# Altium PCB Toffee.PcbDoc
Units mil, origin at the board's own origin, x right, y up, seen from the top; angles counter-clockwise.
Board outline 2249.71 x 1000 mil, 4 copper layers (Component Side, Ground Plane, Power Plane, Solder Side), stack 33.234 mil thick; 139 components, 108 nets, 725 pads, 10 vias.
Unrouted connection lines stored in the file: 521.
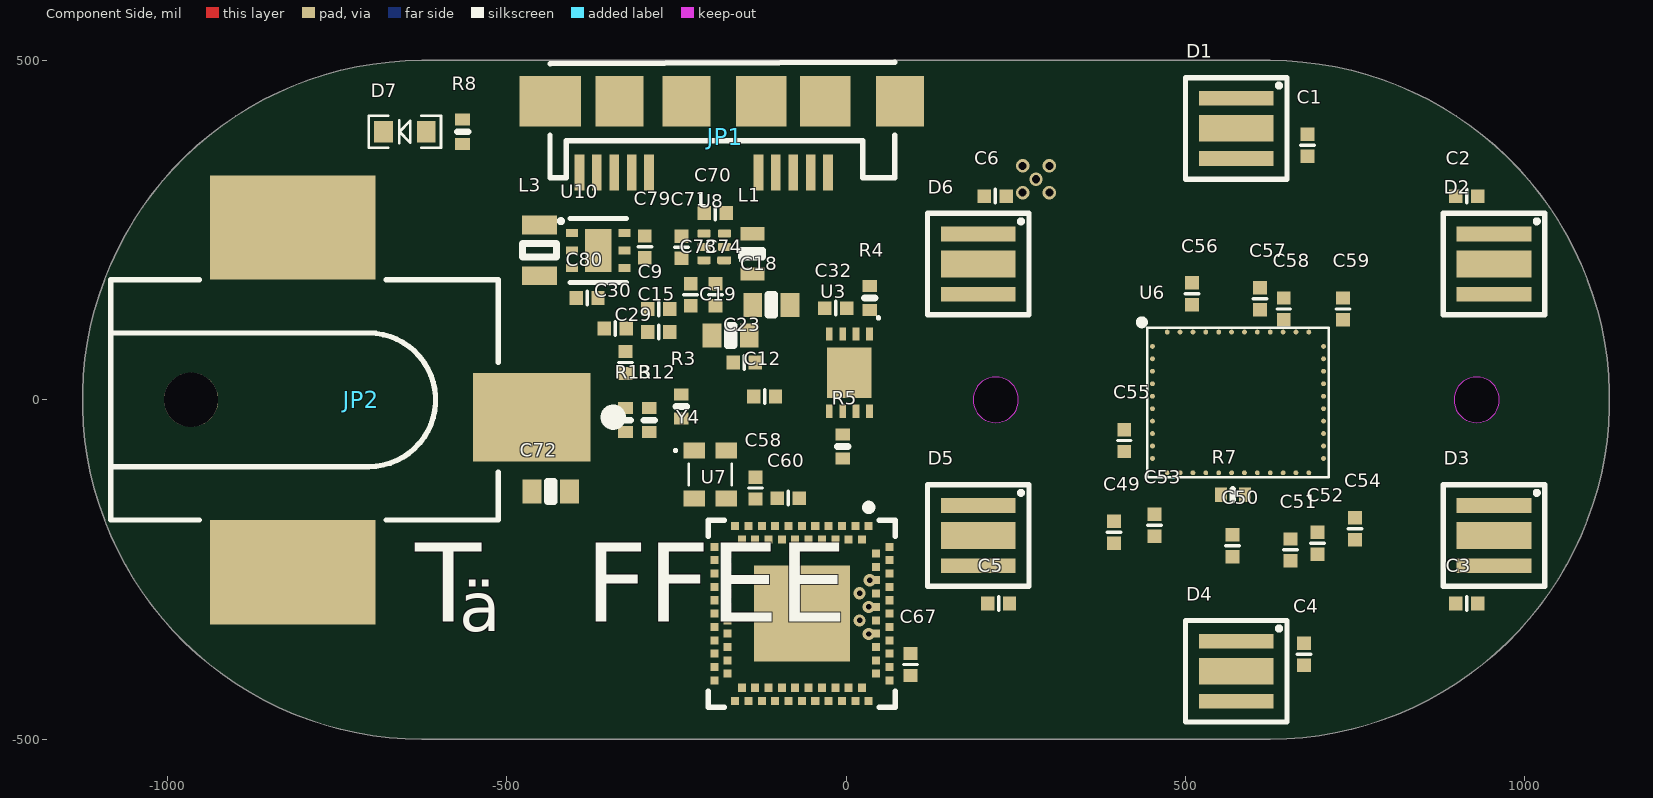
[diagram p0: Component Side view]
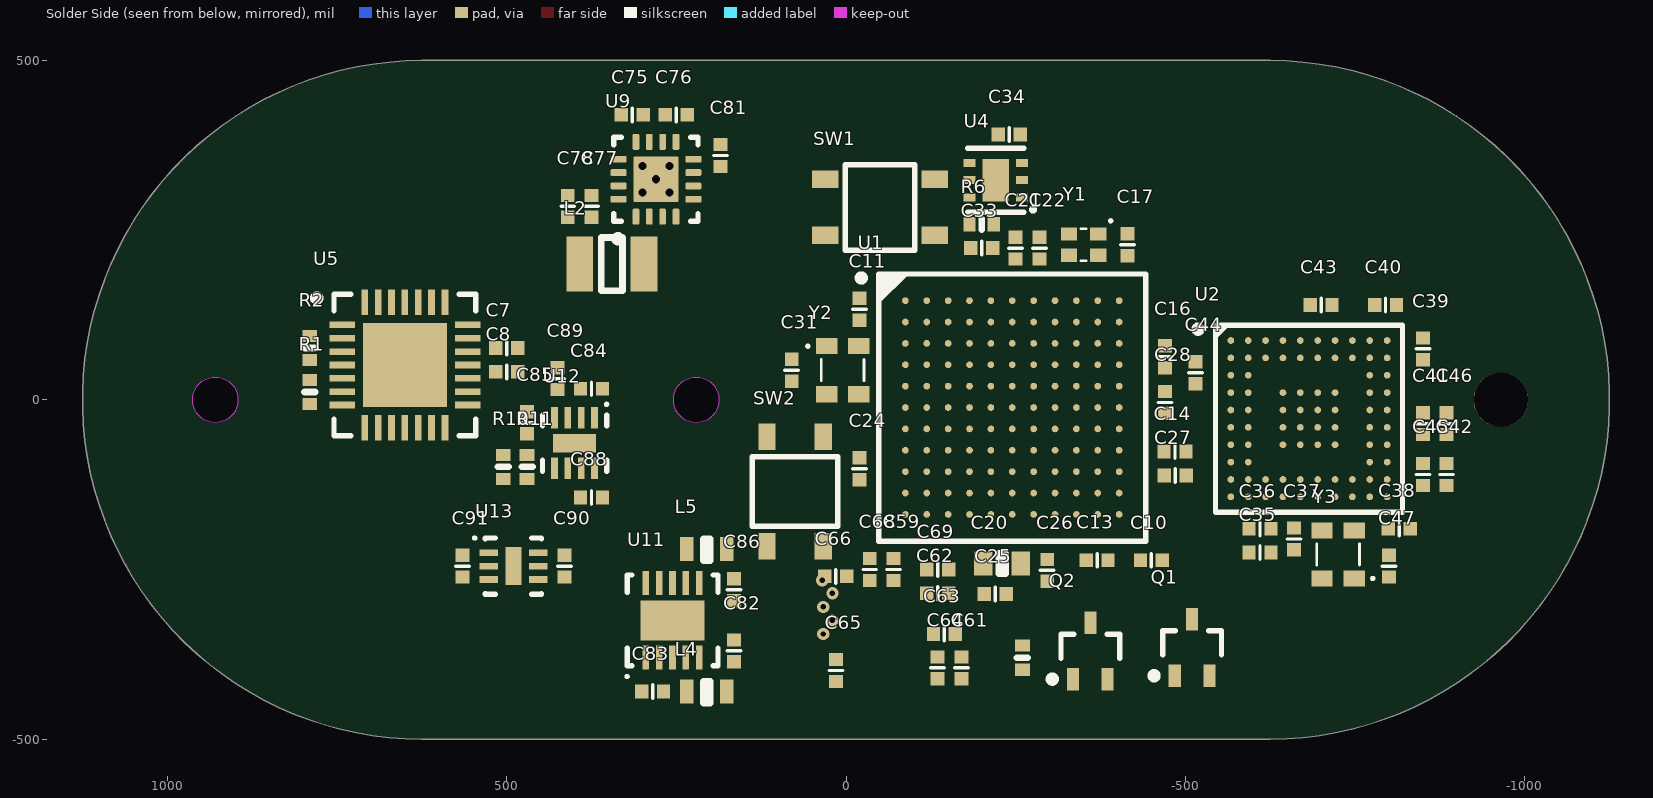
[diagram p1: Solder Side view, seen from below]
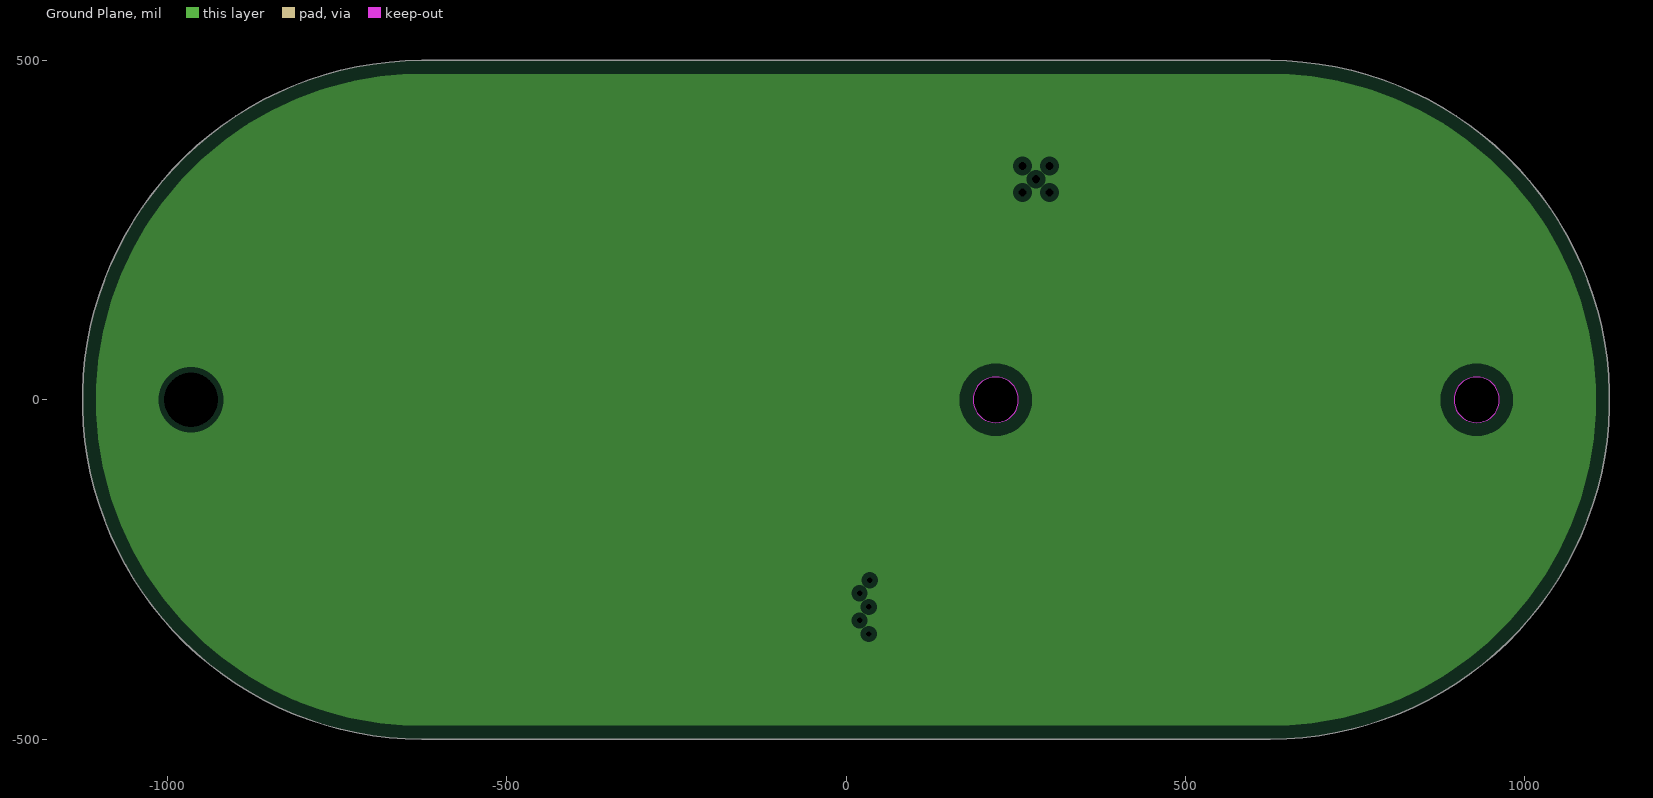
[diagram p2: Ground Plane, clearances drawn from the general rule]
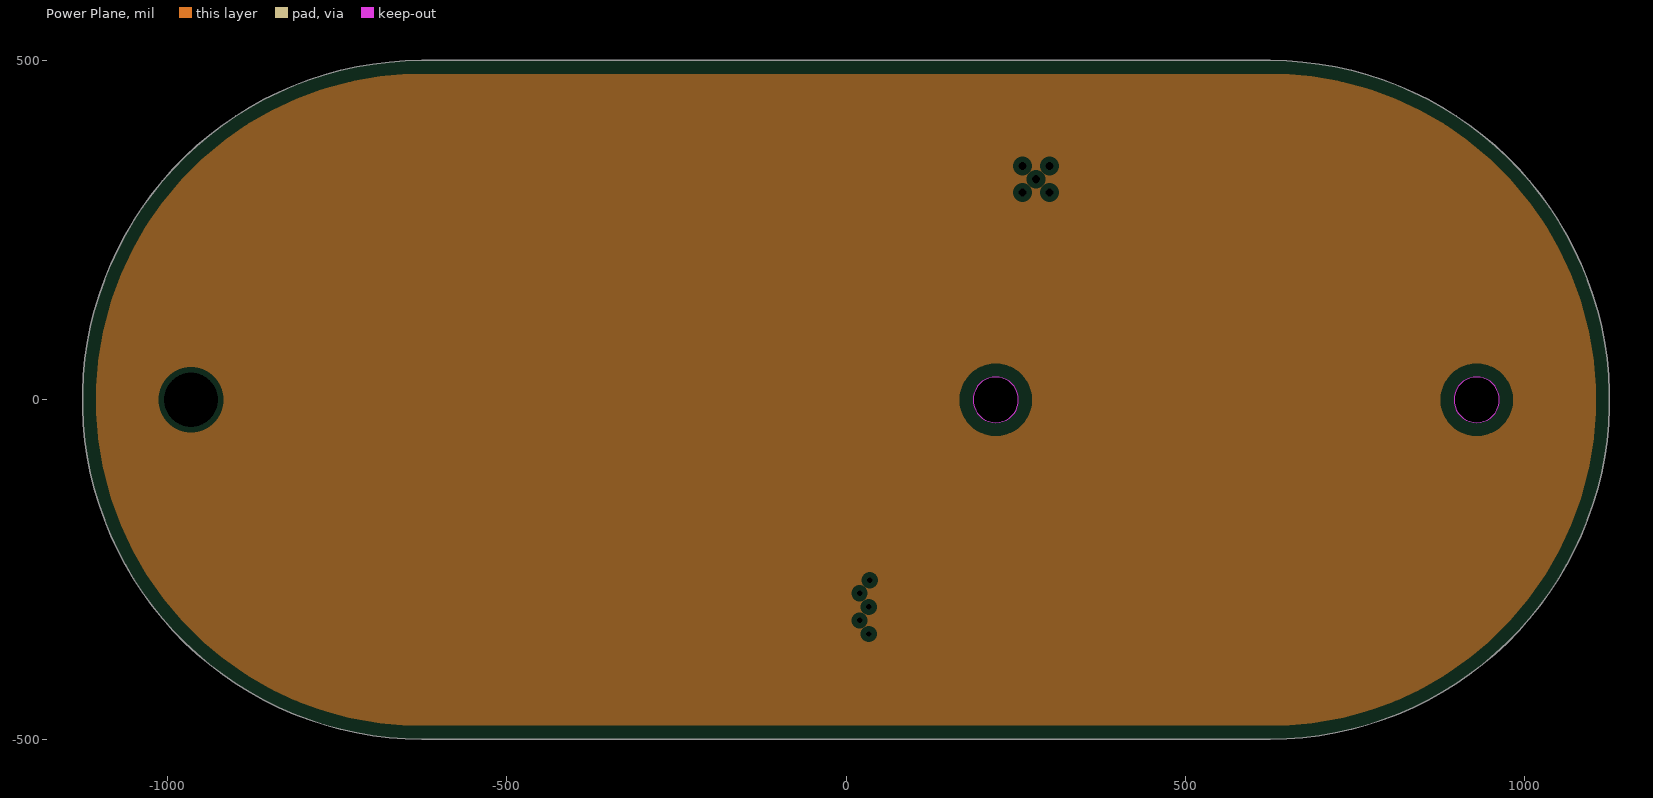
[diagram p3: Power Plane, clearances drawn from the general rule]

## Layer stack, top to bottom
Top Solder: solder mask 0.4, Solder Resist, Dk 3.5
Component Side: signal copper 1.4
Dielectric 1: core 12.6, FR-4, Dk 4.8
Ground Plane: plane copper 1.417
Dielectric 3: prepreg 5, Dk 4.2
Power Plane: plane copper 1.417
Dielectric 4: core 10, Dk 4.2
Solder Side: signal copper 1.4
Bottom Solder: solder mask 0.4, Solder Resist, Dk 3.5

## Board outline
-625,-500 625,-500 ccw(c625,0) 625,500 -625,500 ccw(c-625,0)
cut-out: 187.2,0 ccw(c220.67,0) 220.67,-33.46 ccw(c220.67,0) 254.13,0 ccw(c220.67,0) 220.67,33.46 ccw(c220.67,0)
cut-out: 895.87,0 ccw(c929.33,0) 929.33,-33.46 ccw(c929.33,0) 962.8,0 ccw(c929.33,0) 929.33,33.46 ccw(c929.33,0)

## Design rules (kind name [scope] priority, off if disabled: settings)
Clearance [All] p1: gap=5 ignorepadtopadclearanceinfootprint=FALSE
DiffPairsRouting [All] p1: maxlimit=5 minlimit=5 mostfreqgap=5 toplayer_minwidth=5 toplayer_maxwidth=5 toplayer_prefwidth=5 bottomlayer_minwidth=5 bottomlayer_maxwidth=5 bottomlayer_prefwidth=5 maxuncoupledlength=500
PlaneClearance [All] p1: clearance=8
PlaneConnect [All] p1: planeconnectstyle=Direct reliefexpansion=10 reliefentries=4 reliefconductorwidth=20 reliefairgap=10
PolygonConnect [All] p1: connectstyle=Relief reliefconductorwidth=20 reliefentries=4 polygonreliefangle="90 Angle" airgapwidth=8
RoutingVias [All] p1: holewidth=8 width=18 viastyle="Through Hole" minholewidth=8 minwidth=18 maxholewidth=15 maxwidth=30
SolderMaskExpansion [All] p1: expansion=3 soldermaskfromhole=TRUE
Width [All] p1: maxlimit=20 minlimit=5 preferedwidth=5
27 further rules are at their usual default settings.

## Classes and differential pairs
differential pair class USB2: D MIPI_C MIPI_D0 MIPI_D1 MIPI_D2 MIPI_D3
differential pair class SSTX: SSTX
differential pair class SSRX: SSRX
component class U_Power: C70 C71 C72 C75 C76 C77 C78 C79 C80 C81 C82 C83 C84 C85 C86 C88 C89 C90 C91 D7 JP2 L1 L2 L3 L4 L5 R8 R10 R11 U8 U9 U10 U11 U12 U13
component class U_MLX75123: C58 C59 C60 C61 C62 C63 C64 C65 C66 C67 C68 C69 U7 Y4
component class U_MLX75023: C49 C50 C51 C52 C53 C54 C55 C56 C57 C58 C59 R7 U6
component class U_MIPI-Bridge: C35 C36 C37 C38 C39 C40 C41 C42 C43 C44 C45 C46 C47 U2 Y3
component class U_MCU: C9 C10 C11 C12 C13 C14 C15 C16 C17 C18 C19 C20 C21 C22 C23 C24 C25 C26 C27 C28 C29 C30 C31 C32 C33 C34 C73 C74 JP1 Q1 Q2 R3 R4 R5 R6 R12 R13 SW1 SW2 U1 U3 U4 Y1 Y2
component class U_LEDs: C1 C2 C3 C4 C5 C6 C7 C8 D1 D2 D3 D4 D5 D6 R1 R2 U5
differential pair MIPI_D3: +MIPI_D3_P -MIPI_D3_N
differential pair MIPI_D2: +MIPI_D2_P -MIPI_D2_N
differential pair MIPI_D1: +MIPI_D1_P -MIPI_D1_N
differential pair MIPI_D0: +MIPI_D0_P -MIPI_D0_N
differential pair MIPI_C: +MIPI_C_P -MIPI_C_N
differential pair SSTX: +SSTX_P -SSTX_N
differential pair SSRX: +SSRX_P -SSRX_N
differential pair D: +D_P -D_N

## Components (designator, comment, footprint, x,y, rotation, side; value= is the part's Value field where it differs from the comment)
C1 "10uF 6.3V 0402" C0402[1005X55] 679.8,375 r270 top value=10uF
C2 "10uF 6.3V 0402" C0402[1005X55] 914.8,300 r0 top value=10uF
C3 "10uF 6.3V 0402" C0402[1005X55] 914.8,-300 r0 top value=10uF
C4 "10uF 6.3V 0402" C0402[1005X55] 674.8,-375 r270 top value=10uF
C5 "10uF 6.3V 0402" C0402[1005X55] 224.8,-300 r0 top value=10uF
C6 "10uF 6.3V 0402" C0402[1005X55] 219.8,300 r0 top value=10uF
C7 "10uF 6.3V 0402" C0402[1005X55] 500,76.33 r0 bottom value=10uF
C8 "0.1uF 6.3V 0402" C0402[1005X55] 500,41.33 r0 bottom value=0.1uF
C9 "4.7uF 6.3V 0402" C0402[1005X55] -276.06,133.86 r0 top value=4.7uF
C10 "4.7uF 6.3V 0402" C0402[1005X55] -450,-236.38 r0 bottom value=4.7uF
C11 "0.1uF 6.3V 0402" C0402[1005X55] -20,133.62 r270 bottom value=0.1uF
C12 "0.1uF 6.3V 0402" C0402[1005X55] -120,5 r180 top value=0.1uF
C13 "0.1uF 6.3V 0402" C0402[1005X55] -370,-236.38 r0 bottom value=0.1uF
C14 "0.1uF 6.3V 0402" C0402[1005X55] -484.72,-76.38 r0 bottom value=0.1uF
C15 "0.1uF 6.3V 0402" C0402[1005X55] -276.06,100 r0 top value=0.1uF
C16 "0.1uF 6.3V 0402" C0402[1005X55] -470,63.62 r270 bottom value=0.1uF
C17 "0.1uF 6.3V 0402" C0402[1005X55] -415,228.62 r270 bottom value=0.1uF
C18 "22uF 6.3V 0603" C0603[1608X92] -110,140 r180 top value=22uF
C19 "22uF 6.3V 0603" C0603[1608X92] -170,95 r180 top value=22uF
C20 "22uF 6.3V 0603" C0603[1608X92] -230,-241.38 r0 bottom value=22uF
C21 "4.7uF 6.3V 0402" C0402[1005X55] -250,223.62 r270 bottom value=4.7uF
C22 "0.1uF 6.3V 0402" C0402[1005X55] -285,223.62 r270 bottom value=0.1uF
C23 "0.1uF 6.3V 0402" C0402[1005X55] -150,55 r180 top value=0.1uF
C24 "0.1uF 6.3V 0402" C0402[1005X55] -20,-101.38 r90 bottom value=0.1uF
C25 "0.1uF 6.3V 0402" C0402[1005X55] -220,-286.38 r0 bottom value=0.1uF
C26 "0.1uF 6.3V 0402" C0402[1005X55] -296.5,-251.38 r90 bottom value=0.1uF
C27 "0.1uF 6.3V 0402" C0402[1005X55] -485,-111.38 r0 bottom value=0.1uF
C28 "0.1uF 6.3V 0402" C0402[1005X55] -470,-3.9 r270 bottom value=0.1uF
C29 "0.1uF 6.3V 0402" C0402[1005X55] -325,55 r270 top value=0.1uF
C30 "0.1uF 6.3V 0402" C0402[1005X55] -340,105 r180 top value=0.1uF
C31 "0.1uF 6.3V 0402" C0402[1005X55] 80,43.62 r90 bottom value=0.1uF
C32 "0.1uF 6.3V 0402" C0402[1005X55] -15,135 r0 top value=0.1uF
C33 "0.1uF 6.3V 0402" C0402[1005X55] -200,223.62 r0 bottom value=0.1uF
C34 "0.1uF 100V 0402" C0402[1005X55] -240.59,390.91 r180 bottom value=0.1uF
C35 "4.7uF 6.3V 0402" C0402[1005X55] -610,-225.24 r180 bottom value=4.7uF
C36 "0.1uF 6.3V 0402" C0402[1005X55] -610,-190 r180 bottom value=0.1uF
C37 "0.1uF 6.3V 0402" C0402[1005X55] -660,-205 r90 bottom value=0.1uF
C38 "0.1uF 6.3V 0402" C0402[1005X55] -815,-190 r0 bottom value=0.1uF
C39 "0.1uF 6.3V 0402" C0402[1005X55] -850,75 r270 bottom value=0.1uF
C40 "0.1uF 6.3V 0402" C0402[1005X55] -795,140 r0 bottom value=0.1uF
C41 "4.7uF 6.3V 0402" C0402[1005X55] -850,-35 r90 bottom value=4.7uF
C42 "4.7uF 6.3V 0402" C0402[1005X55] -885,-110 r90 bottom value=4.7uF
C43 "0.1uF 6.3V 0402" C0402[1005X55] -700,140 r180 bottom value=0.1uF
C44 "0.1uF 6.3V 0402" C0402[1005X55] -515,40 r90 bottom value=0.1uF
C45 "0.1uF 6.3V 0402" C0402[1005X55] -850,-110 r90 bottom value=0.1uF
C46 "0.1uF 6.3V 0402" C0402[1005X55] -885,-35 r90 bottom value=0.1uF
C47 "0.1uF 6.3V 0402" C0402[1005X55] -800,-245 r90 bottom value=0.1uF
C49 "0.1uF 6.3V 0402" C0402[1005X55] 395,-195 r90 top value=0.1uF
C50 "0.1uF 6.3V 0402" C0402[1005X55] 569.76,-215 r90 top value=0.1uF
C51 "0.1uF 6.3V 0402" C0402[1005X55] 655,-221.14 r90 top value=0.1uF
C52 "0.1uF 6.3V 0402" C0402[1005X55] 695,-211.14 r90 top value=0.1uF
C53 "10uF 6.3V 0402" C0402[1005X55] 454.61,-185 r90 top value=10uF
C54 "10uF 6.3V 0402" C0402[1005X55] 750,-190 r90 top value=10uF
C55 "0.1uF 6.3V 0402" C0402[1005X55] 410,-60 r90 top value=0.1uF
C56 "0.1uF 6.3V 0402" C0402[1005X55] 510,156.14 r90 top value=0.1uF
C57 "0.1uF 6.3V 0402" C0402[1005X55] 610,148.86 r90 top value=0.1uF
C58 "0.1uF 6.3V 0402" C0402[1005X55] 645,133.86 r90 top value=0.1uF
C58 "1uF 6.3V 0402" C0402[1005X55] -133.58,-130 r270 top value=1uF
C59 "10uF 6.3V 0402" C0402[1005X55] 732.56,133.86 r90 top value=10uF
C59 "4.7uF 6.3V 0402" C0402[1005X55] -70,-250 r90 bottom value=4.7uF
C60 "4.7uF 6.3V 0402" C0402[1005X55] -85,-145 r180 top value=4.7uF
C61 "1uF 6.3V 0402" C0402[1005X55] -170,-395 r270 bottom value=1uF
C62 "1uF 6.3V 0402" C0402[1005X55] -135,-285 r180 bottom value=1uF
C63 "1uF 6.3V 0402" C0402[1005X55] -145,-345 r180 bottom value=1uF
C64 "1uF 6.3V 0402" C0402[1005X55] -135,-395 r270 bottom value=1uF
C65 "1uF 6.3V 0402" C0402[1005X55] 15,-398.86 r270 bottom value=1uF
C66 "1uF 6.3V 0402" C0402[1005X55] 15,-260 r0 bottom value=1uF
C67 "1uF 6.3V 0402" C0402[1005X55] 95,-390 r90 top value=1uF
C68 "1uF 6.3V 0402" C0402[1005X55] -35,-250 r90 bottom value=1uF
C69 "0.1uF 6.3V 0402" C0402[1005X55] -135,-250 r180 bottom value=0.1uF
C70 "2.2uF 6.3V 0402" C0402[1005X55] -192.56,275 r0 top value=2.2uF
C71 "10uF 6.3V 0402" C0402[1005X55] -242.56,225 r270 top value=10uF
C72 "22uF 6.3V 0603" C0603[1608X92] -435,-135 r0 top value=22uF
C73 "0.1uF 6.3V 0402" C0402[1005X55] -228.82,155 r90 top value=0.1uF
C74 "0.1uF 6.3V 0402" C0402[1005X55] -192.56,155 r90 top value=0.1uF
C75 "10uF 6.3V 0402" C0402[1005X55] 315,420 r180 bottom value=10uF
C76 "0.1uF 6.3V 0402" C0402[1005X55] 250,420 r0 bottom value=0.1uF
C77 "10uF 6.3V 0402" C0402[1005X55] 375,285 r270 bottom value=10uF
C78 "10uF 6.3V 0402" C0402[1005X55] 410,285 r270 bottom value=10uF
C79 "10uF 6.3V 0402" C0402[1005X55] -296.5,225.32 r270 top value=10uF
C80 "10uF 6.3V 0402" C0402[1005X55] -381.5,150.32 r180 top value=10uF
C81 "3.3nF 50V 0402" C0402[1005X55] 185,360 r90 bottom value=3.3nF
C82 "10uF 6.3V 0402" C0402[1005X55] 165,-370 r270 bottom value=10uF
C83 "10uF 6.3V 0402" C0402[1005X55] 285,-430 r180 bottom value=10uF
C84 "4.7uF 6.3V 0402" C0402[1005X55] 375,16.33 r180 bottom value=4.7uF
C85 "2.2uF 6.3V 0402" C0402[1005X55] 470,-33.67 r90 bottom value=2.2uF
C86 "10uF 6.3V 0402" C0402[1005X55] 165,-280 r270 bottom value=10uF
C88 "1uF 6.3V 0402" C0402[1005X55] 375,-143.67 r180 bottom value=1uF
C89 "4.7uF 6.3V 0402" C0402[1005X55] 425,31.33 r270 bottom value=4.7uF
C90 "2.2uF 6.3V 0402" C0402[1005X55] 415,-245 r270 bottom value=2.2uF
C91 "2.2uF 6.3V 0402" C0402[1005X55] 565,-245 r270 bottom value=2.2uF
D1 "SFH 4715AS-EA" "SFH 4715AS" 575,400 r0 top
D2 "SFH 4715AS-EA" "SFH 4715AS" 954.8,200 r0 top
D3 "SFH 4715AS-EA" "SFH 4715AS" 954.8,-200 r0 top
D4 "SFH 4715AS-EA" "SFH 4715AS" 575,-400 r0 top
D5 "SFH 4715AS-EA" "SFH 4715AS" 194.8,-200 r0 top
D6 "SFH 4715AS-EA" "SFH 4715AS" 194.8,200 r0 top
D7 "LED_0603_BLUE_5mA" LED0603 -650,395 r180 top
JP1 "USB 3.0" USB-MICROB-3.0 -77.76,440 r180 top
JP2 "POWER_JACK" POWER-JACK-2.1X5.5MM-SMD -965,0 r0 top
L1 "2.2uH" IND0603 -137.56,215 r270 top
L2 "2.2uH" IND1008 345,200 r0 bottom
L3 "2.2uH" IND0805 -451.5,220.32 r270 top
L4 "2.2uH" IND0603 205,-430 r180 bottom
L5 "2.2uH" IND0603 205,-220 r180 bottom
Q1 "BSS123WQ-7-F" SOT323-3 -510,-365 r90 bottom
Q2 "BSS84PWH6327XTSA1" SOT323-3 -360,-370 r90 bottom
R1 "10K 1% 0402" R0402[1005] 790,11.33 r270 bottom value=10K
R2 "100K 1% 0402" R0402[1005] 790,76.33 r270 bottom value=100K
R3 "10K 1% 0402" R0402[1005] -242.56,-10 r270 top value=10K
R4 "4K7 1% 0402" R0402[1005] 35,150 r270 top value=4K7
R5 "100K 1% 0402" R0402[1005] -5,-68.58 r90 top value=100K
R6 "10K 1% 0402" R0402[1005] -200,258.62 r180 bottom value=10K
R7 "330R 1% 0402" R0402[1005] 570,-140 r0 top value=330R
R8 "150R 1% 0402" R0402[1005] -565,395 r270 top value=150R
R10 "75K 1% 0402" R0402[1005] 505,-98.67 r90 bottom value=75K
R11 "51K 1% 0402" R0402[1005] 470,-98.67 r270 bottom value=51K
R12 "4K7 1% 0402" R0402[1005] -290,-30 r270 top value=4K7
R13 "4K7 1% 0402" R0402[1005] -325,-30 r270 top value=4K7
SW1 "RESET" SWITCH -50,283.62 r180 bottom
SW2 "BOOT" SWITCH 75,-135 r270 bottom
U1 "CYUSB3065-BZXC" BGA-121 -245,-11.38 r180 bottom
U2 "TC358748XBG(EL)" BGA-80 -682.2,-27.8 r180 bottom
U3 "LE25U20AQGTXG" "WDFN-8 (2x3MM)" 5,40 r270 top
U4 "TPS3808G33DRVR" WSON-6#1 -220.59,323.62 r0 bottom
U5 "iC-HG" QFN-28 650,51.33 r180 bottom
U6 "MLX75023RTF-BAA-001-SP" BGA-44 577.61,-3.85 r0 top locked
U7 "MLX75123SLA-AAA-000-RE" AQFN-84 -65,-315 r270 top
U8 "TPS62232DRYR" DRY0006A -194.06,225.32 r180 top
U9 "TPS62131RGTR" RGT0016C_V 280,325 r90 bottom
U10 "TPS62291DRVR" WSON-6#2 -365,220 r0 top
U11 "LTC3407EDD-3" "VSON-10 (3mmx3mm)" 255.63,-325.08 r90 bottom
U12 "LM27761DSGR" WSON-8 400,-63.67 r270 bottom
U13 "LT3009EDC-3.3#TRMPBF" LT-DC6-6_V 490,-245 r180 bottom
Y1 "ASCO2-19.200MHZ-EK-T3" ASCO -350,228.62 r0 bottom
Y2 "KC2016K32.0000C1GE00" KC2016K 5,43.62 r270 bottom
Y3 "KC2016K32.0000C1GE00" KC2016K -725,-227.76 r90 bottom
Y4 "KC2016K80.0000C1GE00" KC2016K -200,-110 r270 top
? "10K 1% 0402" R0402[1005] -260,-380 r90 bottom value=10K

## Footprints (in the part's own frame and the unit in brackets; to place one, negate y for a bottom-side part, rotate by r counter-clockwise, add the part's x,y. Pads: shape width x height; smd on the part's side, far side on the other; paste and mask are expansions set on the pad)
AQFN-84 [mm] "Double Row QFN, 84-Leads, Body 7.00x7.00mm, Pitch 0.50mm, Thermal Pad 3.60x3.60mm, IPC High Density"
  rect 0.3x0.3 smd: A1(-3.275,2.5) A2(-3.275,2) A3(-3.275,1.5) A4(-3.275,1) A5(-3.275,0.5) A6(-3.275,0) A7(-3.275,-0.5) A8(-3.275,-1) A9(-3.275,-1.5) A10(-3.275,-2) A11(-3.275,-2.5) A12(-2.5,-3.275) A13(-2,-3.275) A14(-1.5,-3.275) A15(-1,-3.275) A16(-0.5,-3.275) A17(0,-3.275) A18(0.5,-3.275) A19(1,-3.275) A20(1.5,-3.275) A21(2,-3.275) A22(2.5,-3.275) A23(3.275,-2.5) A24(3.275,-2) A25(3.275,-1.5) A26(3.275,-1) A27(3.275,-0.5) A28(3.275,0) A29(3.275,0.5) A30(3.275,1) A31(3.275,1.5) A32(3.275,2) A33(3.275,2.5) A34(2.5,3.275) A35(2,3.275) A36(1.5,3.275) A37(1,3.275) A38(0.5,3.275) A39(0,3.275) A40(-0.5,3.275) A41(-1,3.275) A42(-1.5,3.275) A43(-2,3.275) A44(-2.5,3.275) B1(-2.775,2.25) B2(-2.775,1.75) B3(-2.775,1.25) B4(-2.775,0.75) B5(-2.775,0.25) B6(-2.775,-0.25) B7(-2.775,-0.75) B8(-2.775,-1.25) B9(-2.775,-1.75) B10(-2.775,-2.25) B11(-2.25,-2.775) B12(-1.75,-2.775) B13(-1.25,-2.775) B14(-0.75,-2.775) B15(-0.25,-2.775) B16(0.25,-2.775) B17(0.75,-2.775) B18(1.25,-2.775) B19(1.75,-2.775) B20(2.25,-2.775) B21(2.775,-2.25) B22(2.775,-1.75) B23(2.775,-1.25) B24(2.775,-0.75) B25(2.775,-0.25) B26(2.775,0.25) B27(2.775,0.75) B28(2.775,1.25) B29(2.775,1.75) B30(2.775,2.25) B31(2.25,2.775) B32(1.75,2.775) B33(1.25,2.775) B34(0.75,2.775) B35(0.25,2.775) B36(-0.25,2.775) B37(-0.75,2.775) B38(-1.25,2.775) B39(-1.75,2.775) B40(-2.25,2.775)
  rect 3.6x3.6 smd: EP(0,0)
  silkscreen extent -4.1,-3.5 3.5,3.5, body extent -3.5,-3.5 3.5,3.5, height 1
ASCO [mm]
  rect 0.6x0.5 smd: 1(-0.55,-0.4) 2(0.55,-0.4) 3(0.55,0.4) 4(-0.55,0.4)
  silkscreen extent -1.07,-0.94 0.1,0.6
BGA-44 [mm] "BGA, 44-Leads, Body 6.61x5.48mmx0.50mm, Pitch 0.48mm"
  round 0.18 smd: 1(-3.201,2.097) 2(-3.201,1.631) 3(-3.201,1.165) 4(-3.201,0.699) 5(-3.201,0.233) 6(-3.201,-0.233) 7(-3.201,-0.699) 8(-3.201,-1.165) 9(-3.201,-1.631) 10(-3.201,-2.097) 11(-2.651,-2.634) 12(-2.169,-2.634) 13(-1.687,-2.634) 14(-1.205,-2.634) 15(-0.723,-2.634) 16(-0.241,-2.634) 17(0.241,-2.634) 18(0.723,-2.634) 19(1.205,-2.634) 20(1.687,-2.634) 21(2.169,-2.634) 22(2.651,-2.634) 23(3.201,-2.097) 24(3.201,-1.631) 25(3.201,-1.165) 26(3.201,-0.699) 27(3.201,-0.233) 28(3.201,0.233) 29(3.201,0.699) 30(3.201,1.165) 31(3.201,1.631) 32(3.201,2.097) 33(2.651,2.634) 34(2.169,2.634) 35(1.687,2.634) 36(1.205,2.634) 37(0.723,2.634) 38(0.241,2.634) 39(-0.241,2.634) 40(-0.723,2.634) 41(-1.205,2.634) 42(-1.687,2.634) 43(-2.169,2.634) 44(-2.651,2.634)
  silkscreen extent -3.7,-2.8 3.4,3.1, body extent -3.3,-2.74 3.3,2.74, height 0.5
BGA-80 [mm] "BGA, 80-Leads, Body 7.00x7.00mmx1.00mm, Pitch 0.65mm"
  round 0.25 smd: A1(-2.925,2.925) A2(-2.275,2.925) A3(-1.625,2.925) A4(-0.975,2.925) A5(-0.325,2.925) A6(0.325,2.925) A7(0.975,2.925) A8(1.625,2.925) A9(2.275,2.925) A10(2.925,2.925) B1(-2.925,2.275) B2(-2.275,2.275) B3(-1.625,2.275) B4(-0.975,2.275) B5(-0.325,2.275) B6(0.325,2.275) B7(0.975,2.275) B8(1.625,2.275) B9(2.275,2.275) B10(2.925,2.275) C1(-2.925,1.625) C2(-2.275,1.625) C9(2.275,1.625) C10(2.925,1.625) D1(-2.925,0.975) D2(-2.275,0.975) D4(-0.975,0.975) D5(-0.325,0.975) D6(0.325,0.975) D7(0.975,0.975) D9(2.275,0.975) D10(2.925,0.975) E1(-2.925,0.325) E2(-2.275,0.325) E4(-0.975,0.325) E5(-0.325,0.325) E6(0.325,0.325) E7(0.975,0.325) E9(2.275,0.325) E10(2.925,0.325) F1(-2.925,-0.325) F2(-2.275,-0.325) F4(-0.975,-0.325) F5(-0.325,-0.325) F6(0.325,-0.325) F7(0.975,-0.325) F9(2.275,-0.325) F10(2.925,-0.325) G1(-2.925,-0.975) G2(-2.275,-0.975) G4(-0.975,-0.975) G5(-0.325,-0.975) G6(0.325,-0.975) G7(0.975,-0.975) G9(2.275,-0.975) G10(2.925,-0.975) H1(-2.925,-1.625) H2(-2.275,-1.625) H9(2.275,-1.625) H10(2.925,-1.625) J1(-2.925,-2.275) J2(-2.275,-2.275) J3(-1.625,-2.275) J4(-0.975,-2.275) J5(-0.325,-2.275) J6(0.325,-2.275) J7(0.975,-2.275) J8(1.625,-2.275) J9(2.275,-2.275) J10(2.925,-2.275) K1(-2.925,-2.925) K2(-2.275,-2.925) K3(-1.625,-2.925) K4(-0.975,-2.925) K5(-0.325,-2.925) K6(0.325,-2.925) K7(0.975,-2.925) K8(1.625,-2.925) K9(2.275,-2.925) K10(2.925,-2.925)
  silkscreen extent -4.28,-3.5 3.5,3.5, body extent -3.5,-3.5 3.5,3.5, height 1
BGA-121 [mm] "BGA, 121-Leads, Body 10.00x10.00mmx1.70mm, Pitch 0.80mm"
  round 0.25 smd: A1(-4,4) A2(-3.2,4) A3(-2.4,4) A4(-1.6,4) A5(-0.8,4) A6(0,4) A7(0.8,4) A8(1.6,4) A9(2.4,4) A10(3.2,4) A11(4,4) B1(-4,3.2) B2(-3.2,3.2) B3(-2.4,3.2) B4(-1.6,3.2) B5(-0.8,3.2) B6(0,3.2) B7(0.8,3.2) B8(1.6,3.2) B9(2.4,3.2) B10(3.2,3.2) B11(4,3.2) C1(-4,2.4) C2(-3.2,2.4) C3(-2.4,2.4) C4(-1.6,2.4) C5(-0.8,2.4) C6(0,2.4) C7(0.8,2.4) C8(1.6,2.4) C9(2.4,2.4) C10(3.2,2.4) C11(4,2.4) D1(-4,1.6) D2(-3.2,1.6) D3(-2.4,1.6) D4(-1.6,1.6) D5(-0.8,1.6) D6(0,1.6) D7(0.8,1.6) D8(1.6,1.6) D9(2.4,1.6) D10(3.2,1.6) D11(4,1.6) E1(-4,0.8) E2(-3.2,0.8) E3(-2.4,0.8) E4(-1.6,0.8) E5(-0.8,0.8) E6(0,0.8) E7(0.8,0.8) E8(1.6,0.8) E9(2.4,0.8) E10(3.2,0.8) E11(4,0.8) F1(-4,0) F2(-3.2,0) F3(-2.4,0) F4(-1.6,0) F5(-0.8,0) F6(0,0) F7(0.8,0) F8(1.6,0) F9(2.4,0) F10(3.2,0) F11(4,0) G1(-4,-0.8) G2(-3.2,-0.8) G3(-2.4,-0.8) G4(-1.6,-0.8) G5(-0.8,-0.8) G6(0,-0.8) G7(0.8,-0.8) G8(1.6,-0.8) G9(2.4,-0.8) G10(3.2,-0.8) G11(4,-0.8) H1(-4,-1.6) H2(-3.2,-1.6) H3(-2.4,-1.6) H4(-1.6,-1.6) H5(-0.8,-1.6) H6(0,-1.6) H7(0.8,-1.6) H8(1.6,-1.6) H9(2.4,-1.6) H10(3.2,-1.6) H11(4,-1.6) J1(-4,-2.4) J2(-3.2,-2.4) J3(-2.4,-2.4) J4(-1.6,-2.4) J5(-0.8,-2.4) J6(0,-2.4) J7(0.8,-2.4) J8(1.6,-2.4) J9(2.4,-2.4) J10(3.2,-2.4) J11(4,-2.4) K1(-4,-3.2) K2(-3.2,-3.2) K3(-2.4,-3.2) K4(-1.6,-3.2) K5(-0.8,-3.2) K6(0,-3.2) K7(0.8,-3.2) K8(1.6,-3.2) K9(2.4,-3.2) K10(3.2,-3.2) K11(4,-3.2) L1(-4,-4) L2(-3.2,-4) L3(-2.4,-4) L4(-1.6,-4) L5(-0.8,-4) L6(0,-4) L7(0.8,-4) L8(1.6,-4) L9(2.4,-4) L10(3.2,-4) L11(4,-4)
  silkscreen extent -5.77,-5 5,5, body extent -5,-5 5,5, height 1.7
C0402[1005X55] [mm] "Chip Capacitor, Body 1.0x0.5mm"
  rect 0.5x0.52 smd: 1(-0.41,0) 2(0.41,0)
  silkscreen extent 0,-0.25 0,0.25, body extent -0.5,-0.25 0.5,0.25, height 0.56
C0603[1608X92] [mm] "Chip Capacitor, Body 1.6x0.8mm"
  rect 0.7x0.9 smd: 1(-0.7,0) 2(0.7,0)
  silkscreen extent -0.13,-0.38 0.13,0.38, body extent -0.8,-0.4 0.8,0.4, height 0.93
DRY0006A [mm] "SON, 6-Leads, Body 1.45x1mm, Pitch 0.5mm"
  rrect33% 0.52x0.3 smd: 1(-0.37,0.5)
  rrect33% 0.49x0.3 smd: 2(-0.385,0) 3(-0.385,-0.5) 4(0.385,-0.5) 5(0.385,0) 6(0.385,0.5)
  silkscreen extent -1.08,0.45 -0.98,0.55, body extent -0.5,-0.72 0.5,0.72, height 0.6
IND0603 [mm] "Chip Inductor, Body 1.55x0.85mm"
  rect 0.5x0.9 smd: 1(-0.75,0) 2(0.75,0)
  silkscreen extent -0.13,-0.43 0.13,0.38, body extent -0.85,-0.48 0.75,0.48, height 0.81
IND0805 [mm] "Chip Inductor Body 2.0x1.25mm"
  rect 0.7x1.3 smd: 1(-0.95,0) 2(0.95,0)
  silkscreen extent -0.25,-0.64 0.25,0.64, body extent -1,-0.63 1,0.63, height 0.85
IND1008 [mm] "Chip Inductor Body 2.5x2.0mm"
  rect 1x2.05 smd: 1(-1.2,0) 2(1.2,0)
  silkscreen extent -0.4,-1 0.4,1, body extent -1,-0.63 1,0.62, height 0.85
KC2016K [mm]
  rect 0.6x0.8 smd: 1(-0.9,-0.6) 2(0.9,-0.6) 3(0.9,0.6) 4(-0.9,0.6)
  silkscreen extent -0.95,-1.35 0.4,0.8
LED0603 [mm]
  rect 0.7x0.8 smd: A(-0.8,0) C(0.8,0)
  silkscreen extent -1.35,-0.6 1.35,0.6, body extent -0.8,-0.4 0.8,0.4, height 0.75
LT-DC6-6_V [mm] "SON, 6-Leads, Body 2x2mm, Pitch 0.5mm, Thermal Pad 1.42x0.61mm"
  rect 0.7x0.25 smd mask+0.102: 1(-0.925,0.5) 2(-0.925,0) 4(0.925,-0.5) 5(0.925,0)
  rect 0.7x0.25 smd paste+0 mask+0.102: 3(-0.925,-0.5)
  rect 0.7x0.25 smd: 6(0.925,0.5)
  rect 0.61x1.42 smd: 7(0,0)
  silkscreen extent -1.5,-1.05 1.05,1.1, body extent -1,-1 1,1, height 0.8
POWER-JACK-2.1X5.5MM-SMD [mm]
  round 2.032 hole 2.032: 0(0,0)
  rect 4.4x3.3 smd: 1(12.75,-0.65)
  rect 6.2x3.9 smd: 2(3.8,6.45) 3(3.8,-6.45)
  silkscreen extent -3,-4.5 16.02,4.5, body extent -3,-7.6 14.1,7.6, height 11
QFN-28 [mm] "QFN, 28-Leads, Body 5.00x5.00mm, Pitch 0.50mm, Thermal Pad 3.15x3.15mm, IPC Medium Density"
  rect 0.95x0.25 smd: 1(-2.35,1.5) 2(-2.35,1) 3(-2.35,0.5) 4(-2.35,0) 5(-2.35,-0.5) 6(-2.35,-1) 7(-2.35,-1.5) 15(2.35,-1.5) 16(2.35,-1) 17(2.35,-0.5) 18(2.35,0) 19(2.35,0.5) 20(2.35,1) 21(2.35,1.5)
  rect 0.25x0.95 smd: 8(-1.5,-2.35) 9(-1,-2.35) 10(-0.5,-2.35) 11(0,-2.35) 12(0.5,-2.35) 13(1,-2.35) 14(1.5,-2.35) 22(1.5,2.35) 23(1,2.35) 24(0.5,2.35) 25(0,2.35) 26(-0.5,2.35) 27(-1,2.35) 28(-1.5,2.35)
  rect 3.15x3.15 smd: 29(0,0)
  silkscreen extent -3.43,-2.65 2.65,2.65, body extent -2.51,-2.51 2.51,2.51, height 0.9
R0402[1005] [mm] "Chip Resistor, Body 1.0x0.5mm"
  rect 0.45x0.55 smd: 1(-0.45,0) 2(0.45,0)
  silkscreen extent 0,-0.2 0,0.2, body extent -0.5,-0.25 0.5,0.25, height 0.35
RGT0016C_V [mm] "QFN, 16-Leads, Body 3x3mm, Pitch 0.5mm, Thermal Pad 1.65x1.65mm"
  rrect40% 0.6x0.25 smd: 1(-1.4,0.75) 2(-1.4,0.25) 3(-1.4,-0.25) 4(-1.4,-0.75) 9(1.4,-0.75) 10(1.4,-0.25) 11(1.4,0.25) 12(1.4,0.75)
  rrect40% 0.25x0.6 smd: 5(-0.75,-1.4) 6(-0.25,-1.4) 7(0.25,-1.4) 8(0.75,-1.4) 13(0.75,1.4) 14(0.25,1.4) 15(-0.25,1.4) 16(-0.75,1.4)
  rrect6% 1.55x1.55 on Bottom Paste: 17(0,0)
  rrect6% 1.7x1.7 smd paste-0.85: 17(0,0)
  silkscreen extent -2.35,-1.57 1.57,1.58, body extent -1.5,-1.5 1.5,1.5, height 1
"SFH 4715AS" [mm]
  rect 2.8x0.55 smd: A(0,-1.125) C(0,1.125)
  rect 2.8x1 smd: A(0,0)
  silkscreen extent -1.9,-1.9 1.9,1.9, body extent -1.92,-1.92 1.93,1.93, height 2.4
SOT323-3 [mm] "SOT23, 3-Leads, Body 2.00x2.10mm, Pitch 0.65mm, IPC Medium Density"
  rect 0.85x0.45 smd: 1(-1.055,0.65) 2(-1.055,-0.65) 3(1.055,0)
  silkscreen extent -1.18,-1.1 0.63,1.55, body extent -1.12,-1.1 1.12,1.1, height 1.1
SWITCH [mm]
  rect 1x0.65 smd: 1(-2.05,1.05) 2(2.05,1.05) 3(-2.05,-1.05) 4(2.05,-1.05)
  silkscreen extent -1.3,-1.6 1.3,1.6, body extent -2.3,-1.6 2.3,1.6, height 2.5
USB-MICROB-3.0 [mm]
  rect 0.36x1.35 smd: 1(-1.3,2.667) 2(-0.65,2.667) 3(0,2.667) 4(0.65,2.667) 5(1.3,2.667) 6(5.4,2.667) 7(6.05,2.667) 8(6.7,2.667) 9(7.35,2.667) 10(8,2.667)
  rect 1.8x1.9 smd: 11(-4,0) 11(4,0) 11(6.5,0)
  rect 1.9x1.9 smd: 11(-1.2,0) 11(1.2,0)
  rect 2.3x1.9 smd: 11(9.1,0)
  silkscreen extent -3.8,-1.45 9.1,2.87, body extent -4.42,-2.81 9.73,2.9, height 2.75
"VSON-10 (3mmx3mm)" [mm] "VSON, 10-Leads, Body 3.00x3.00mm, Pitch 0.50mm, Thermal Pad 2.40x1.49mm, IPC Medium Density"
  rect 0.9x0.25 smd: 1(-1.395,1) 2(-1.395,0.5) 3(-1.395,0) 4(-1.395,-0.5) 5(-1.395,-1) 6(1.395,-1) 7(1.395,-0.5) 8(1.395,0) 9(1.395,0.5) 10(1.395,1)
  rect 1.49x2.4 smd: 11(0,0)
  silkscreen extent -2.15,-1.7 1.7,1.75, body extent -1.55,-1.55 1.55,1.55, height 1
"WDFN-8 (2x3MM)" [mm] "SON, 8-Leads, Body 2.00x3.00mm, Pitch 0.50mm, Thermal Pad 1.50x1.88mm, IPC Medium Density"
  rect 0.5x0.25 smd: 1(-1.45,0.75) 2(-1.45,0.25) 3(-1.45,-0.25) 4(-1.45,-0.75) 5(1.45,-0.75) 6(1.45,-0.25) 7(1.45,0.25) 8(1.45,0.75)
  rect 1.9x1.66 smd: 9(0,0)
  silkscreen extent -2.1,1.04 -2,1.14, body extent -1.5,-1 1.5,1, height 0.8
WSON-6#1 [mm] "SON, 6-Leads, Body 2x2mm, Pitch 0.65mm, Thermal Pad 1.6x1mm, TI Recommended"
  rect 0.45x0.3 smd: 1(-0.975,0.65) 2(-0.975,0) 3(-0.975,-0.65) 4(0.975,-0.65) 5(0.975,0) 6(0.975,0.65)
  rrect14% 1x0.7 on Bottom Paste: 7(0,-0.45) 7(0,0.45)
  rect 1x1.6 smd paste-0.5: 7(0,0)
  silkscreen extent -1.45,-1.2 1.05,1.2, body extent -1.05,-1.05 1.05,1.05, height 0.81
WSON-6#2 [mm] "SON, 6-Leads, Body 2x2mm, Pitch 0.65mm, Thermal Pad 1.6x1mm, TI Recommended"
  rect 0.45x0.3 smd: 1(-0.975,0.65) 2(-0.975,0) 3(-0.975,-0.65) 4(0.975,-0.65) 5(0.975,0) 6(0.975,0.65)
  rrect14% 1x0.7 on Top Paste: 7(0,-0.45) 7(0,0.45)
  rect 1x1.6 smd paste-0.5: 7(0,0)
  silkscreen extent -1.45,-1.2 1.05,1.2, body extent -1.05,-1.05 1.05,1.05, height 0.81
WSON-8 [mm] "SON, 8-Leads, Body 2.00x2.00mm, Pitch 0.50mm, Thermal Pad 1.60x0.69mm, IPC Medium Density"
  rect 0.8x0.25 smd mask+0.08: 1(-0.945,0.75) 2(-0.945,0.25) 3(-0.945,-0.25) 4(-0.945,-0.75) 5(0.945,-0.75) 6(0.945,-0.25) 7(0.945,0.25) 8(0.945,0.75)
  rect 0.69x1.6 smd paste-0.345 mask+0.08: 9(0,0)
  silkscreen extent -1.5,-1.2 1.05,1.25, body extent -1.05,-1.05 1.05,1.05, height 0.8

## Part data
C1 C2 C3 C4 C5 C6 C7 C53 C54 C59 C71 C75 C77 C78 C79 C80 C82 C83 C86: library part CAP_10uF_6.3V_0402_20%, "10uF 6.3V 20% 0402 (1005 Metric)", Manufacturer=Murata, PartNumber=GRM155R60J106ME44D, Tolerance=20%, Voltage=6.3V, Mounting Technology="Surface Mount", PackageDescription="0402 (1005 Metric)", PackageReference=0402
C8 C11 C12 C13 C14 C15 C16 C17 C22 C23 C24 C25 C26 C27 C28 C29 C30 C31 C32 C33 C36 C37 C38 C39 C40 C43 C44 C45 C46 C47 C49 C50 C51 C52 C55 C56 C57 C58 C69 C73 C74 C76: library part CAP_0.1uF_6.3V_0402_10%, "0.1uF 6.3V 10% 0402 (1005 Metric)", Manufacturer=Murata, PartNumber=GRM155R70J104KA01D, Tolerance=10%, Voltage=6.3V, Mounting Technology="Surface Mount", PackageDescription="0402 (1005 Metric)", PackageReference=0402
C9 C10 C21 C35 C41 C42 C59 C60 C84 C89: library part CAP_4.7uF_6.3V_0402_20%, "4.7uF 6.3V 20% 0402 (1005 Metric)", Manufacturer=Murata, PartNumber=GRM155R60J475ME47D, Tolerance=20%, Voltage=6.3V, Mounting Technology="Surface Mount", PackageDescription="0402 (1005 Metric)", PackageReference=0402
C18 C19 C20 C72: library part CAP_22uF_6.3V_0603_10%, "22uF 6.3V 10% 0603 (1608 Metric)", Manufacturer=Murata, PartNumber=GRT188R60J226ME13D, Tolerance=10%, Voltage=6.3V, Mounting Technology="Surface Mount", PackageDescription="0603 (1608 Metric)", PackageReference=0603
C34: library part CAP_0.1uF_100V_0402_10%, "0.1uF 100V 10% 0402 (1005 Metric)", Manufacturer=Murata, PartNumber=GRM155R62A104KE14D, Tolerance=10%, Voltage=100V, Mounting Technology="Surface Mount", PackageDescription="0402 (1005 Metric)", PackageReference=0402
C58 C61 C62 C63 C64 C65 C66 C67 C68 C88: library part CAP_1uF_6.3V_0402_10%, "1uF 6.3V 10% 0402 (1005 Metric)", Manufacturer=Murata, PartNumber=GRM155R70J105KA12D, Tolerance=10%, Voltage=6.3V, Mounting Technology="Surface Mount", PackageDescription="0402 (1005 Metric)", PackageReference=0402
C70 C85 C90 C91: library part CAP_2.2uF_6.3V_0402_20%, "2.2uF 6.3V 20% 0402 (1005 Metric)", Manufacturer=Murata, PartNumber=GRM155R60J225ME15D, Tolerance=20%, Voltage=6.3V, Mounting Technology="Surface Mount", PackageDescription="0402 (1005 Metric)", PackageReference=0402
C81: library part CAP_3.3nF_50V_0402_10%, "3.3nF 50V 10% 0402 (1005 Metric)", Manufacturer=Murata, PartNumber=GRM155R71H332KA01D, Tolerance=10%, Voltage=50V, Mounting Technology="Surface Mount", PackageDescription="0402 (1005 Metric)", PackageReference=0402
D1 D2 D3 D4 D5 D6: Manufacturer=Osram, Package Reference=SMD-3, Mounting Technology="Surface Mount", PartNumber="SFH 4715AS-EA"
D7: Manufacturer="Lite-On Inc.", PartNumber=LTST-C193TBKT-5A, Mounting Technology="Surface Mount", PackageDescription="0603 (1608 Metric)", PackageReference=0603
JP1: library part USB_MICROB_3.0_SMT, Manufacturer="Amphenol FCI", PartNumber=GSB343133HR, Mounting Technology="Surface Mount", PackageReference="USB 3.0 - Micro B"
JP2: Manufacturer="CUI Inc.", PartNumber=PJ-036AH-SMT-TR, Mounting Technology="Surface Mount", PackageReference=2X5.5MM
L1 L4 L5: library part IND_2.2uH_750mA_0603_20%, "2.2uH 20% 750mA 0603", Current=750mA, Manufacturer=Murata, PartNumber=LQM18PZ2R2MCHD, Mounting Technology="Surface Mount", PackageDescription="0603 (1608 metric)", PackageReference=0603
L2: library part IND_2.2uH_3.3A_1008_20%, "2.2uH 20% 3.3A 1008", Current=3.3A, Manufacturer=Murata, PartNumber=DFE252012F-2R2M=P2, Mounting Technology="Surface Mount", PackageDescription="1008 (2520 metric)", PackageReference=1008
L3: library part IND_2.2uH_1.7A_0805_20%, "2.2uH 20% 1.7A 0805", Current=1.7A, Manufacturer=Murata, PartNumber=LQM21PN2R2MGHL, Mounting Technology="Surface Mount", PackageDescription="0805 (2012 metric)", PackageReference=0805
Q1: "N-Channel MOSFET", Manufacturer="Diodes Incorporated", Mounting Technology="Surface Mount", PackageReference=SOT-323-3, PartNumber=BSS123WQ-7-F
Q2: library part "BSS84PW H6327", "P-Channel MOSFET", Manufacturer=Infineon, Mounting Technology="Surface Mount", PackageReference=SOT323-3, PartNumber=BSS84PWH6327XTSA1
R1 R3 R6 ?: library part RES_10K_0402_1%, "10K 0.063W 1% 0402 (1005 Metric)", Manufacturer="KOA Speer", PartNumber=RK73H1ETTP1002F, Power=0.063W, Tolerance=1%, ComponentLink1Description=Datasheet, ComponentLink1URL=http://www.koaspeer.com/catimages/Products/RK73H/RK73H.pdf, Mounting Technology="Surface Mount", PackageDescription="0402 (1005 Metric)", PackageReference=0402
R2 R5: library part RES_100K_0402_1%, "100K 0.063W 1% 0402 (1005 Metric)", Manufacturer="KOA Speer", PartNumber=RK73H1ETTP1003F, Power=0.063W, Tolerance=1%, ComponentLink1Description=Datasheet, ComponentLink1URL=http://www.koaspeer.com/catimages/Products/RK73H/RK73H.pdf, Mounting Technology="Surface Mount", PackageDescription="0402 (1005 Metric)", PackageReference=0402
R4 R12 R13: library part RES_4K7_0402_1%, "4K7 0.063W 1% 0402 (1005 Metric)", Manufacturer="KOA Speer", PartNumber=RK73H1ETTP4701F, Power=0.063W, Tolerance=1%, ComponentLink1Description=Datasheet, ComponentLink1URL=http://www.koaspeer.com/catimages/Products/RK73H/RK73H.pdf, Mounting Technology="Surface Mount", PackageDescription="0402 (1005 Metric)", PackageReference=0402
R7: library part RES_330R_0402_1%_1, "330R 0.063W 1% 0402 (1005 Metric)", Manufacturer="KOA Speer", PartNumber=RK73H1ETTP3300F, Power=0.063W, Tolerance=1%, ComponentLink1Description=Datasheet, ComponentLink1URL=http://www.koaspeer.com/catimages/Products/RK73H/RK73H.pdf, Mounting Technology="Surface Mount", PackageDescription="0402 (1005 Metric)", PackageReference=0402
R8: library part RES_150R_0402_1%, "150R 0.063W 1% 0402 (1005 Metric)", Manufacturer="KOA Speer", PartNumber=RK73H1ETTP1500F, Power=0.063W, Tolerance=1%, ComponentLink1Description=Datasheet, ComponentLink1URL=http://www.koaspeer.com/catimages/Products/RK73H/RK73H.pdf, Mounting Technology="Surface Mount", PackageDescription="0402 (1005 Metric)", PackageReference=0402
R10: library part RES_75K_0402_1%, "75K 0.063W 1% 0402 (1005 Metric)", Manufacturer="KOA Speer", PartNumber=RK73H1ETTP7502F, Power=0.063W, Tolerance=1%, ComponentLink1Description=Datasheet, ComponentLink1URL=http://www.koaspeer.com/catimages/Products/RK73H/RK73H.pdf, Mounting Technology="Surface Mount", PackageDescription="0402 (1005 Metric)", PackageReference=0402
R11: library part RES_51K_0402_1%, "51K 0.063W 1% 0402 (1005 Metric)", Manufacturer="KOA Speer", PartNumber=RK73H1ETTP5102F, Power=0.063W, Tolerance=1%, ComponentLink1Description=Datasheet, ComponentLink1URL=http://www.koaspeer.com/catimages/Products/RK73H/RK73H.pdf, Mounting Technology="Surface Mount", PackageDescription="0402 (1005 Metric)", PackageReference=0402
SW1 SW2: library part DIPT-DTSM-6, "Switch, SPNO Push Button SMD", Manufacturer="C&K Components", PartNumber="PTS810 SJM 250 SMTR LFS", ComponentLink1Description="Manufacturer URL", ComponentLink1URL=http://www.dip.com.tw/, ComponentLink2Description=Datasheet, ComponentLink2URL=http://www.dip.com.tw/Products_tact.htm, ComponentLink3Description="Package Specification", ComponentLink3URL=http://www.dip.com.tw/PDF/pro_tact/DTSM_G_-6_2_-V.pdf, Mechanical Life="200,000 cycles", Mounting Technology="Surface Mount", PackageDescription="Switch, Surface Mount, 4 Leads, Body 4.6x2.8mm, Height 1.9mm", PackageReference=PTS810, Packing Type=Tape&Reel
U1: library part CYUSB3065-BZXCXC, "MCU MIPI CSI-2 to USB Bridge Controller", Manufacturer="Cypress Semiconductor", Mounting Technology="Surface Mount", PackageReference=BGA-121, PartNumber=CYUSB3065-BZXC
U2: "IC MIPI CSI2 TO PARALLEL 80VFBGA", Manufacturer="Toshiba Semiconductor", Mounting Technology="Surface Mount", PackageReference=BGA-80, PartNumber=TC358748XBG(EL)
U3: "IC FLASH 2M SPI 30MHZ 8WDFN", Manufacturer="ON Semiconductor", Mounting Technology="Surface Mount", PackageReference=WDFN-8, PartNumber=LE25U20AQGTXG
U4: "IC VOLT SUPERVISOR 3.3V", Manufacturer="Texas Instruments", Mounting Technology="Surface Mount", PackageReference=WSON-6, PartNumber=TPS3808G33DRVR
U5: library part "iC-HG QFN28-5x5", Manufacturer=iC-Haus, Mounting Technology="Surface Mount", PackageReference=QFN-28, PartNumber="iC-HG QFN28-5x5"
U6: Manufacturer=Melexis, Mounting Technology="Surface Mount", PackageReference=BGA-44, PartNumber=MLX75023RTF-BAA-001-SP
U7: "Sensor Interface ToF Companion Chip", Manufacturer=Melexis, Mounting Technology="Surface Mount", PackageReference=AQFN-84, PartNumber=MLX75123SLA-AAA-000-RE
U8: library part CMP-0323-00291-3, "Buck Step Down Regulator with 2.05 to 6 V Input and 1.2 V Output, -40 to 85 degC, 6-Pin SON (DRY), Green (RoHS & no Sb/Br)", Manufacturer="Texas Instruments", Rating=Catalog, Switch Current Limit(Typ)(A)=0.84, ComponentLink1Description=Datasheet, ComponentLink1URL=http://www.ti.com/general/docs/lit/getliterature.tsp?genericPartNumber=TPS62232&fileType=pdf, ComponentLink2Description="Package Specification", ComponentLink2URL=http://www.ti.com/litv/pdf/mpds221e, ComponentLink3Description="URL Link1", ComponentLink3URL="Samples URL:http://www.ti.com/product/tps62232#samples", DatasheetVersion=SLVS941E, Duty Cycle(Max)(%)=100, Eco-Plan="Green (RoHS & no Sb/Br)", Iout(Max)(A)=0.5, Iq(Typ)(mA)=0.022, Mounting Technology="Surface Mount", PackageDescription="6-Pin Plastic Small Outline No-Lead, 1 x 1.45 x 0.6 mm Body, 0.5 mm Pitch", PackageReference=DRY0006A, PackageVersion="revF, Dec-2011", PartNumber=TPS62232DRYR, Preset Vout(V)=1.2, Regulated Outputs(#)=1, SubFamily="Step-Down Regulator", Synchronous Rectification=TRUE, Topology=Buck, Vin(Max)(V)=6, Vin(Min)(V)=2.05, Vout(Max)(V)=1.2, Vout(Min)(V)=1.2
U9: library part CMP-0323-00113-2, "Buck Step Down Regulator with 3 to 17 V Input and 1.8 V Output, -40 to 85 degC, 16-Pin QFN (RGT), Green (RoHS & no Sb/Br)", Manufacturer="Texas Instruments", Rating=Catalog, Switch Current Limit(Typ)(A)=4.2, Code_JEDEC=MO-220, ComponentLink1Description=Datasheet, ComponentLink1URL=http://www.ti.com/general/docs/lit/getliterature.tsp?genericPartNumber=TPS62131&fileType=pdf, ComponentLink2Description="URL Link1", ComponentLink2URL="Samples URL:http://www.ti.com/product/tps62131#samples", DatasheetVersion=SLVSAG7, Duty Cycle(Max)(%)=100, Eco-Plan="Green (RoHS & no Sb/Br)", Iout(Max)(A)=3, Iq(Typ)(mA)=0.017, Mounting Technology="Surface Mount", PackageDescription="16-Pin Plastic Quad Flat No-Lead, 3 x 3 mm Body, 0.5 mm Pitch, 1.7 x 1.7 mm Exposed Pad", PackageReference=RGT0016C, PackageVersion="revH, Oct-2011", PartNumber=TPS62131RGTR, Preset Vout(V)=1.8, Regulated Outputs(#)=1, SubFamily="Step-Down Regulator", Synchronous Rectification=TRUE, Topology=Buck, Vin(Max)(V)=17, Vin(Min)(V)=3, Vout(Max)(V)=1.8, Vout(Min)(V)=1.8
U10: "Voltage Regulators - Switching Regulators 2.25MHz 1A Step-Down Cnvrtr 3.3V Output", Manufacturer="Texas Instruments", Mounting Technology="Surface Mount", PackageDescription="SON, 6-Leads, Body 2x2mm, Pitch 0.65mm, Thermal Pad 1.6x1mm, TI Recommended", PackageReference=WSON-6, PartNumber=TPS62291DRVR
U11: Manufacturer="Linear Technology", Mounting Technology="Surface Mount", PackageReference=SON-10, PartNumber=LTC3407EDD-3
U12: "Switching Voltage Regulators Switch Cap Boost", Manufacturer="Texas Instruments", Mounting Technology="Surface Mount", PackageReference=WSON-8, PartNumber=LM27761DSGR
U13: library part CMP-0476-00025-3, "3 uA IQ, 20 mA Low Dropout Linear Regulator, 1.6 to 20 V Vin, 3.3 V Vout, 6-pin SON (DC6-6), -40 to 125 degC, Pb-Free, Mini Tape and Reel", Dropout Voltage(V)=0.28, Manufacturer="Linear Technology", Output Voltage="3.3 V", Shutdown Current(uA)=1, Code_JEDEC=MO-229, ComponentLink1Description="Manufacturer URL", ComponentLink1URL=http://www.linear.com/, ComponentLink2Description=Datasheet, ComponentLink2URL=http://cds.linear.com/docs/en/datasheet/3009fd.pdf, ComponentLink3Description="Package Specification", ComponentLink3URL=http://cds.linear.com/docs/en/packaging/DFN_6_05-08-1703.pdf, DatasheetVersion="Rev. D", Discrete Pass Element=no, Iout(mA)=20, Isupply(mA)=0.003, Mounting Technology="Surface Mount", Noise(uV)=150, Number of Outputs=1, PackageDescription="6-Pin Plastic DFN, Body 2 x 2 mm, Pitch 0.5 mm", PackageReference=DC6-6, PackageVersion="Rev. B, 06/2010", Packing="Mini Tape and Reel", PartNumber=LT3009EDC-3.3#TRMPBF, PSRR(dB)=61, RoHS=TRUE, Vin Max(V)=20, Vin Min(V)=1.6
Y1: "OSC XO 19.2MHZ CMOS SMD", Manufacturer=Abracon, Mounting Technology="Surface Mount", PackageReference=SMD-4, PartNumber=ASCO2-19.200MHZ-EK-T3
Y2 Y3: "OSC XO 32.0000MHZ CMOS SMD", Manufacturer=Kyocera, Mounting Technology="Surface Mount", PackageReference=SMD-4, PartNumber=KC2016K32.0000C1GE00
Y4: "OSC XO 80.0000MHZ CMOS SMD", Manufacturer=AVX, Mounting Technology="Surface Mount", PackageReference=SMD-4, PartNumber=KC2016K80.0000C1GE00

## Via types
v1: diameter 19.68, hole 11.81, Component Side to Solder Side, 5 vias
v2: diameter 18, hole 8, Component Side to Solder Side, 5 vias

## Nets (pads, with @x,y where several pads share a name; then routed paths per layer and width w, separated by ;. In a path a pad name is that pad's centre, name@x,y a point inside that pad or via, vN(x,y) a via of type N, cw(c..) or ccw(c..) an arc to the next point about the centre after c; other vN are vias at no path point)
1V2: C18.2 C19.2 C20.2 C21.2 C22.2 C23.2 C24.2 C25.2 C26.2 C27.2 C28.2 C29.2 C30.2 C41.2 C42.2 C43.2 C44.2 C45.2 C46.2 C71.2 L1.2 U1.A2 U1.A7 U1.B5 U1.B10 U1.C3 U1.E9 U1.F11 U1.H1 U1.J11 U1.L5 U1.L7 U2.A7 U2.B1 U2.E10 U2.H10 U8.6
1V8: C58.2@-133.58,-146.14 C59.2@-70,-233.86 C60.2 C61.2 C62.2 C82.2 L4.2 U7.A9 U7.A10 U7.B5 U7.B14 U7.B20 U11.1
3V3: ?.2 C7.2 C8.2 C9.2 C10.2 C11.2 C12.2 C13.2 C14.2 C15.2 C17.2 C31.2 C32.2 C35.2 C36.2 C37.2 C38.2 C39.2 C40.2 C47.1 C49.2 C50.2 C51.2 C52.2 C53.2 C54.2 C80.2 L3.2 Q2.2 R1.2 R4.1 R6.2 R8.2 R12.2 R13.2 U1.B1 U1.B6 U1.E3 U1.G4 U1.H11 U1.L9 U2.A9 U2.B10 U2.H1 U2.K4 U2.K5 U2.K9 U3.3 U3.7 U3.8 U4.1 U4.2 U5.18 U5.19 U6.18 U6.22 U6.33 U6.44 U10.3 Y1.4 Y2.1 Y2.4 Y3.1 Y3.4
3V3_SLOW: C63.2 C64.2 C65.2 C66.2 C67.2 C68.2 C69.2 C86.1 L5.2 U7.A36 U7.B4 U7.B12 U7.B17 U7.B21 U7.B30 U7.B38 U11.10 Y4.1 Y4.4
  other v2: 35,-265.79
5V: C1.2 C2.2 C3.2 C4.2 C5.2 C6.2 C72.2 C75.2 C76.2 D1.A D2.A D3.A D4.A D5.A D6.A JP2.1 U9.10 U9.11 U9.12 U9.13
ARRAYBIAS: C85.2 R7.1 R10.2 U12.4
CLKIN: U1.D7 Y1.3
COLUMN0: U6.30 U7.B37
  other v2: 20,-285
COLUMN1: U6.29 U7.A40
COLUMN2: U6.28 U7.B36
  other v2: 33.43,-305.16
COLUMN3: U6.27 U7.A39
COLUMN4: U6.26 U7.B35
  other v2: 20,-325
COLUMN5: U6.25 U7.A38
COLUMN6: U6.24 U7.B34
  other v2: 33.43,-345
COLUMN7: U6.23 U7.A37
CORE_RESET: U6.20 U7.A3
CSI2_D0: U2.J3 U7.A30
CSI2_D1: U2.K3 U7.B27
CSI2_D2: U2.J2 U7.A29
CSI2_D3: U2.K2 U7.B26
CSI2_D4: U2.J1 U7.A28
CSI2_D5: U2.K1 U7.B25
CSI2_D6: U2.G6 U7.A27
CSI2_D7: U2.G1 U7.B24
CSI2_D8: U2.F2 U7.A26
CSI2_D9: U2.F1 U7.B23
CSI2_D10: U2.E2 U7.A25
CSI2_D11: U2.E1 U7.B22
CSI2_HSYNC: U2.J7 U7.B29
CSI2_PIXCLK: U2.J6 U7.B28
CSI2_VSYNC: U2.K7 U7.A31
D_N: JP1.2 U1.A10
D_P: JP1.3 U1.A9
DMIX0: U6.35 U7.A35
DMIX1: U6.34 U7.B32
GND: C1.1 C2.1 C3.1 C4.1 C5.1 C6.1 C7.1 C8.1 C9.1 C10.1 C11.1 C12.1 C13.1 C14.1 C15.1 C16.1 C17.1 C18.1 C19.1 C20.1 C21.1 C22.1 C23.1 C24.1 C25.1 C26.1 C27.1 C28.1 C29.1 C30.1 C31.1 C32.1 C33.1 C34.1 C35.1 C36.1 C37.1 C38.1 C39.1 C40.1 C41.1 C42.1 C43.1 C44.1 C45.1 C46.1 C47.2 C49.1 C50.1 C51.1 C52.1 C53.1 C54.1 C55.1 C56.1 C57.1 C58.1 C59.1 C60.1 C61.1 C62.1 C63.1 C64.1 C65.1 C66.1 C67.1 C68.1 C69.1 C70.1 C71.1 C72.1 C75.1 C76.1 C77.1 C78.1 C79.1 C80.1 C81.1 C82.1 C83.1 C84.1 C85.1 C86.2 C89.1 C90.1 C91.1 D7.C JP1.5 JP1.8 JP1.11 JP2.2 JP2.3 Q1.2 R2.1 R3.1 R5.1 R11.1 SW1.3 SW2.1 U1.A1 U1.A8 U1.B2 U1.B7 U1.B8 U1.B9 U1.D8 U1.E2 U1.E11 U1.G1 U1.G11 U1.K3 U1.K4 U1.L1 U1.L2 U1.L3 U1.L6 U1.L11 U2.A1 U2.A10 U2.B7 U2.D4 U2.D5 U2.D7 U2.E4 U2.E5 U2.E6 U2.E7 U2.E9 U2.F4 U2.F5 U2.F6 U2.F7 U2.G4 U2.G5 U2.G7 U2.H2 U2.H9 U2.J4 U2.J5 U2.K10 U3.4 U4.5 U4.7@-220.59,323.62 U5.4 U5.8 U5.10 U5.12 U5.24 U5.26 U5.28 U5.29 U6.10 U6.13 U6.15 U6.32 U6.36 U6.39 U6.40 U6.43 U7.A5 U7.A8 U7.A11 U7.A16 U7.A17 U7.A18 U7.A21 U7.A22 U7.A24 U7.A33 U7.A41 U7.B8 U7.B9 U7.B10 U7.B15 U7.B16 U7.B18 U7.B19 U7.B33 U7.EP U8.1 U8.4 U9.5 U9.6 U9.7 U9.8 U9.15 U9.16 U9.17@280,325 U10.2 U10.6 U10.7@-365,220 U11.5 U11.11 U12.2 U12.9 U13.6 U13.7 Y1.2 Y2.2 Y3.2 Y4.2
  other v1: 260.31,305.32 299.69,305.32 280,325 260.31,344.68 299.69,344.68
I2C1_SCL: R12.1 U1.D9 U2.A8 U7.A12
I2C1_SDA: R13.1 U1.D10 U2.B8 U7.B11
LATCH_ENABLE: U6.9 U7.A4
LEDN: U5.14 U5.16 U5.20 U7.B31
LEDP: U5.15 U5.17 U5.21 U7.A34
MIPI_C_N: U1.K7 U2.F10
MIPI_C_P: U1.J7 U2.F9
MIPI_D0_N: U1.K5 U2.J10
MIPI_D0_P: U1.J5 U2.J9
MIPI_D1_N: U1.K6 U2.G10
MIPI_D1_P: U1.J6 U2.G9
MIPI_D2_N: U1.J9 U2.D10
MIPI_D2_P: U1.J8 U2.D9
MIPI_D3_N: U1.K8 U2.C10
MIPI_D3_P: U1.L8 U2.C9
MIXH: C55.2 C56.2 C57.2 C58.2@645,150 C59.2@732.56,150 C77.2 C78.2 L2.2 U6.37 U6.38 U6.41 U6.42 U9.14
Net_1: ?.1 Q1.1 Q2.1 SW2.4
NetC34_2: C34.2 U4.3
NetC73_2: C73.2 U1.A6
NetC74_2: C74.2 U1.A5
NetC81_2: C81.2 U9.9
NetC88_1: C88.1 U12.7
NetC88_2: C88.2 U12.8
NetC89_2: C89.2 U12.3
NetD1_C: D1.C U5.27
NetD2_C: D2.C U5.25
NetD3_C: D3.C U5.23
NetD4_C: D4.C U5.13
NetD5_C: D5.C U5.11
NetD6_C: D6.C U5.9
NetD7_A: D7.A R8.1
NetL1_1: L1.1 U8.2
NetL2_1: L2.1 U9.1 U9.2 U9.3
NetL3_1: L3.1 U10.1
NetL4_1: L4.1 U11.4
NetL5_1: L5.1 U11.7
NetR1_1: R1.1 R2.2 U5.1 U5.2 U5.3 U5.5 U5.6 U5.7
NetR3_2: R3.2 U1.H6
NetR7_2: R7.2 U6.17
NetR10_1: R10.1 R11.2 U12.5
NetSW1_2: SW1.2 U4.4
NetU1_F4: U1.F4 U2.B9 U7.A14
NetU2_K6: U2.K6 Y3.3
NetU7_B13: U7.B13 Y4.3
OUT0: U6.14 U7.B6
OUT1: U6.16 U7.A6
OUT2: U6.12 U7.A7
OUT3: U6.11 U7.B7
PIXELFLUSH: U6.19 U7.B3
PIXELVDD: C91.2 U6.21 U13.2 U13.3
PMODE1: Q2.3 U1.H4
PMODE2: Q1.3 U1.L4
REFCLK: U1.F2 Y2.3
RESET: C33.2 R6.1 U1.C5 U4.6
ROW0: U6.8 U7.A42
ROW1: U6.7 U7.B39
ROW2: U6.6 U7.A43
ROW3: U6.5 U7.B40
ROW4: U6.4 U7.A44
ROW5: U6.3 U7.A1
ROW6: U6.2 U7.B1
ROW7: U6.1 U7.A2
SHUTTER: U6.31 U7.B2
SPI_MISO: U1.C2 U3.2
SPI_MOSI: U1.D5 U3.5
SPI_SCK: R5.2 U1.D4 U3.6
SPI_SSN: R4.2 U1.C1 U3.1
SSRX_N: JP1.9 U1.A3
SSRX_P: JP1.10 U1.A4
SSTX_N: C73.1 JP1.6
SSTX_P: C74.1 JP1.7
VUSB: C16.2 C70.2 C79.2 C83.2 C84.2 C90.2 JP1.1 U1.E10 U8.3 U8.5 U10.4 U10.5 U11.2 U11.3 U11.6 U11.9 U12.1 U12.6 U13.4 U13.5
pads on no net: JP1.4 JP2.0 SW1.1 SW1.4 SW2.2 SW2.3 U1.A11 U1.B3 U1.B4 U1.B11 U1.C4 U1.C6 U1.C7 U1.C8 U1.C9 U1.C10 U1.C11 U1.D1 U1.D2 U1.D3 U1.D6 U1.D11 U1.E1 U1.E4 U1.E5 U1.E6 U1.E7 U1.E8 U1.F1 U1.F3 U1.F5 U1.F6 U1.F7 U1.F8 U1.F9 U1.F10 U1.G2 U1.G3 U1.G5 U1.G6 U1.G7 U1.G8 U1.G9 U1.G10 U1.H2 U1.H3 U1.H5 U1.H7 U1.H8 U1.H9 U1.H10 U1.J1 U1.J2 U1.J3 U1.J4 U1.J10 U1.K1 U1.K2 U1.K9 U1.K10 U1.K11 U1.L10 U2.A2 U2.A3 U2.A4 U2.A5 U2.A6 U2.B2 U2.B3 U2.B4 U2.B5 U2.B6 U2.C1 U2.C2 U2.D1 U2.D2 U2.D6 U2.G2 U2.J8 U2.K8 U3.9 U4.7@-220.59,305.91 U4.7@-220.59,341.34 U5.22 U7.A13 U7.A15 U7.A19 U7.A20 U7.A23 U7.A32 U9.4 U9.17@280,325 U10.7@-365,202.28 U10.7@-365,237.72 U11.8 U13.1 Y1.1

## Polygon pours and split planes (outlines as drawn)
no net on Ground Plane (split plane): 687.7,476.25 728.97,468.97 769.45,458.13 808.83,443.8 846.81,426.08 883.1,405.13 917.42,381.1 949.53,354.16 979.16,324.53 1006.1,292.42 1030.13,258.1 1051.08,221.81 1068.8,183.83 1083.13,144.45 1093.97,103.97 1101.25,62.7 1104.9,20.95 1104.9,-20.95 1101.25,-62.7 1093.97,-103.97 1083.13,-144.45 1068.8,-183.83 1051.08,-221.81 1030.13,-258.1 1006.1,-292.42 979.16,-324.53 949.53,-354.16 917.42,-381.1 883.1,-405.13 846.81,-426.08 808.83,-443.8 769.45,-458.13 728.97,-468.97 687.7,-476.25 645.95,-479.9 625,-479.9 -625,-479.9 -645.95,-479.9 -687.7,-476.25 -728.97,-468.97 -769.45,-458.13 -808.83,-443.8 -846.81,-426.08 -883.1,-405.13 -917.42,-381.1 -949.53,-354.16 -979.16,-324.53 -1006.1,-292.42 -1030.13,-258.1 -1051.08,-221.81 -1068.8,-183.83 -1083.13,-144.45 -1093.97,-103.97 -1101.25,-62.7 -1104.9,-20.95 -1104.9,20.95 -1101.25,62.7 -1093.97,103.97 -1083.13,144.45 -1068.8,183.83 -1051.08,221.81 -1030.13,258.1 -1006.1,292.42 -979.16,324.53 -949.53,354.16 -917.42,381.1 -883.1,405.13 -846.81,426.08 -808.83,443.8 -769.45,458.13 -728.97,468.97 -687.7,476.25 -645.95,479.9 -625,479.9 625,479.9 645.95,479.9
no net on Power Plane (split plane): 687.7,476.25 728.97,468.97 769.45,458.13 808.83,443.8 846.81,426.08 883.1,405.13 917.42,381.1 949.53,354.16 979.16,324.53 1006.1,292.42 1030.13,258.1 1051.08,221.81 1068.8,183.83 1083.13,144.45 1093.97,103.97 1101.25,62.7 1104.9,20.95 1104.9,-20.95 1101.25,-62.7 1093.97,-103.97 1083.13,-144.45 1068.8,-183.83 1051.08,-221.81 1030.13,-258.1 1006.1,-292.42 979.16,-324.53 949.53,-354.16 917.42,-381.1 883.1,-405.13 846.81,-426.08 808.83,-443.8 769.45,-458.13 728.97,-468.97 687.7,-476.25 645.95,-479.9 625,-479.9 -625,-479.9 -645.95,-479.9 -687.7,-476.25 -728.97,-468.97 -769.45,-458.13 -808.83,-443.8 -846.81,-426.08 -883.1,-405.13 -917.42,-381.1 -949.53,-354.16 -979.16,-324.53 -1006.1,-292.42 -1030.13,-258.1 -1051.08,-221.81 -1068.8,-183.83 -1083.13,-144.45 -1093.97,-103.97 -1101.25,-62.7 -1104.9,-20.95 -1104.9,20.95 -1101.25,62.7 -1093.97,103.97 -1083.13,144.45 -1068.8,183.83 -1051.08,221.81 -1030.13,258.1 -1006.1,292.42 -979.16,324.53 -949.53,354.16 -917.42,381.1 -883.1,405.13 -846.81,426.08 -808.83,443.8 -769.45,458.13 -728.97,468.97 -687.7,476.25 -645.95,479.9 -625,479.9 625,479.9 645.95,479.9

## Silkscreen, mask and mechanical layers (free items; w line width, h text height)
Top Overlay:
  text "T   FFEE" at -635,-365 h200
  text "ä" at -570,-365 h125
Drill Drawing:
  circle w10: c220.67,0 r33.46
  circle w10: c929.33,0 r33.46
  lines w10: -625,-500 cw(c-625,0) -625,500 625,500 cw(c625,0) 625,-500 -625,-500